# EAGLE board Parte 1 (EAGLE 9.7.0)

Size 149.12 x 86.76 mm. Coordinates in mm from the lower left corner, seen from the top.
Outline: 0,0 149.12,0 149.12,86.76 0,86.76 0,0
Copper layers (1*16): Top 0.035mm / dielectric 1.5mm / Bottom 0.035mm
Design rules "default": minimum track width 6mil, minimum drill 0.35mm, track to track 6mil, track to pad 6mil, pad to pad 6mil, via to via 6mil, smd to smd 6mil, copper to edge 40mil, drill to drill 6mil, minimum pad ring 10mil, minimum via ring 8mil, stop-mask expansion 4mil, vias tented up to drill 0mil, thermal gap 10mil

## Footprints (pad centres in the part's own frame; a part is rotated, then mirrored left to right if it is on the bottom)
7SEG-13 = drill 0.813 long: 1 -5.08,-7.62; 2 -2.54,-7.62; 3 0,-7.62; 4 2.54,-7.62; 5 5.08,-7.62; 6 5.08,7.62; 7 2.54,7.62; 8 0,7.62; 9 -2.54,7.62; 10 -5.08,7.62
RESAD1016W63L850D250B = drill 0.83 pad 1.43: 1 -5.08,0; 2 5.08,0
SWITCH-MOMENTARY-PTH-6.5MM = drill 1.016 pad 1.88: 1 -3.251,2.261; 2 3.251,2.261; 3 -3.251,-2.261; 4 3.251,-2.261
ARDUINO-UNO-R3-SHIELD = drill 1.016 pad 1.88: 3.3V 24.13,-2.54; 5V 24.13,0; A0 24.13,12.7; A1 24.13,15.24; A2 24.13,17.78; A3 24.13,20.32; A4 24.13,22.86; A5 24.13,25.4; AREF -24.13,-13.97; D2 -24.13,20.32; D3 -24.13,17.78; D4 -24.13,15.24; D5 -24.13,12.7; D6 -24.13,10.16; D7 -24.13,7.62; D8 -24.13,3.81; D9 -24.13,1.27; D10 -24.13,-1.27; D11 -24.13,-3.81; D12 -24.13,-6.35; D13 -24.13,-8.89; GND@0 24.13,2.54; GND@1 24.13,5.08; GND@2 -24.13,-11.43; IOREF 24.13,-7.62; NC 24.13,-10.16; RES 24.13,-5.08; RX -24.13,25.4; SCL -24.13,-19.05; SDA -24.13,-16.51; TX -24.13,22.86; VIN 24.13,7.62

## Placement (x,y rotation side)
DIGIT1  7SEG-CK  [7SEG-13]  123.34,27.95 0 top
DIGIT2  7SEG-CK  [7SEG-13]  139.85,28.04 0 top
R1  220  [RESAD1016W63L850D250B]  70.03,31.48 0 top
R2  220  [RESAD1016W63L850D250B]  80.14,28.85 0 top
R3  220  [RESAD1016W63L850D250B]  69.92,43.1 0 top
R4  220  [RESAD1016W63L850D250B]  80.33,40.58 0 top
R5  220  [RESAD1016W63L850D250B]  70.43,37.97 0 top
R6  220  [RESAD1016W63L850D250B]  80.69,35.53 0 top
R7  220  [RESAD1016W63L850D250B]  70.18,26.31 0 top
R8  220  [RESAD1016W63L850D250B]  80.1,45.57 0 top
S1  SWITCH_MOMENTARY  [SWITCH-MOMENTARY-PTH-6.5MM]  66.11,8.13 270 top
S2  SWITCH_MOMENTARY  [SWITCH-MOMENTARY-PTH-6.5MM]  78.6,7.51 270 top
S3  SWITCH_MOMENTARY  [SWITCH-MOMENTARY-PTH-6.5MM]  90.69,7.37 270 top
U1  ARDUINO-UNO-R3-SHIELD  [ARDUINO-UNO-R3-SHIELD]  29.84,38.87 180 top

## Library data of the parts
DIGIT1 DIGIT2 = Tinkercad; CATEGORY: Opto-Electronic; SUB-CATEGORY: Display; TYPE: 7-Segment
R1-R8 S1-S3 U1 = Tinkercad

## Nets
DIGIT1_A: DIGIT1.7 DIGIT2.7 R4.2
DIGIT1_B: DIGIT1.6 DIGIT2.6 R3.2
DIGIT1_C: DIGIT1.4 DIGIT2.4 R7.2
DIGIT1_D: DIGIT1.2 DIGIT2.2 R2.2
DIGIT1_DP: DIGIT1.5 DIGIT2.5 R8.2
DIGIT1_E: DIGIT1.1 DIGIT2.1 R1.2
DIGIT1_F: DIGIT1.9 DIGIT2.9 R5.2
DIGIT1_G: DIGIT1.10 DIGIT2.10 R6.2
U1_A4: DIGIT1.3 U1.A4
U1_A5: DIGIT2.3 U1.A5
U1_D2: S1.1 U1.D2
U1_D3: S2.1 U1.D3
U1_D4: S3.1 U1.D4
U1_D5: R7.1 U1.D5
U1_D6: R2.1 U1.D6
U1_D7: R1.1 U1.D7
U1_D8: R6.1 U1.D8
U1_D9: R5.1 U1.D9
U1_D10: R4.1 U1.D10
U1_D11: R3.1 U1.D11
U1_D12: R8.1 U1.D12
U1_GND: S1.4 S2.4 S3.4 U1.GND@0 U1.GND@1 U1.GND@2

## Tracks (layer width: path | path; a pad name or v marks a point on that pad's centre or on a via)
DIGIT1_A  (2 unrouted)
DIGIT1_B  (2 unrouted)
DIGIT1_C  (2 unrouted)
DIGIT1_D  (2 unrouted)
DIGIT1_DP  (2 unrouted)
DIGIT1_E  (2 unrouted)
DIGIT1_F  (2 unrouted)
DIGIT1_G  (2 unrouted)
U1_A4  (1 unrouted)
U1_A5  (1 unrouted)
U1_D2  (1 unrouted)
U1_D3  (1 unrouted)
U1_D4  (1 unrouted)
U1_D5  (1 unrouted)
U1_D6  (1 unrouted)
U1_D7  (1 unrouted)
U1_D8  (1 unrouted)
U1_D9  (1 unrouted)
U1_D10  (1 unrouted)
U1_D11  (1 unrouted)
U1_D12  (1 unrouted)
U1_GND  (5 unrouted)